# EAGLE board ts4231-breakout-module-panel (EAGLE 6.5.0)
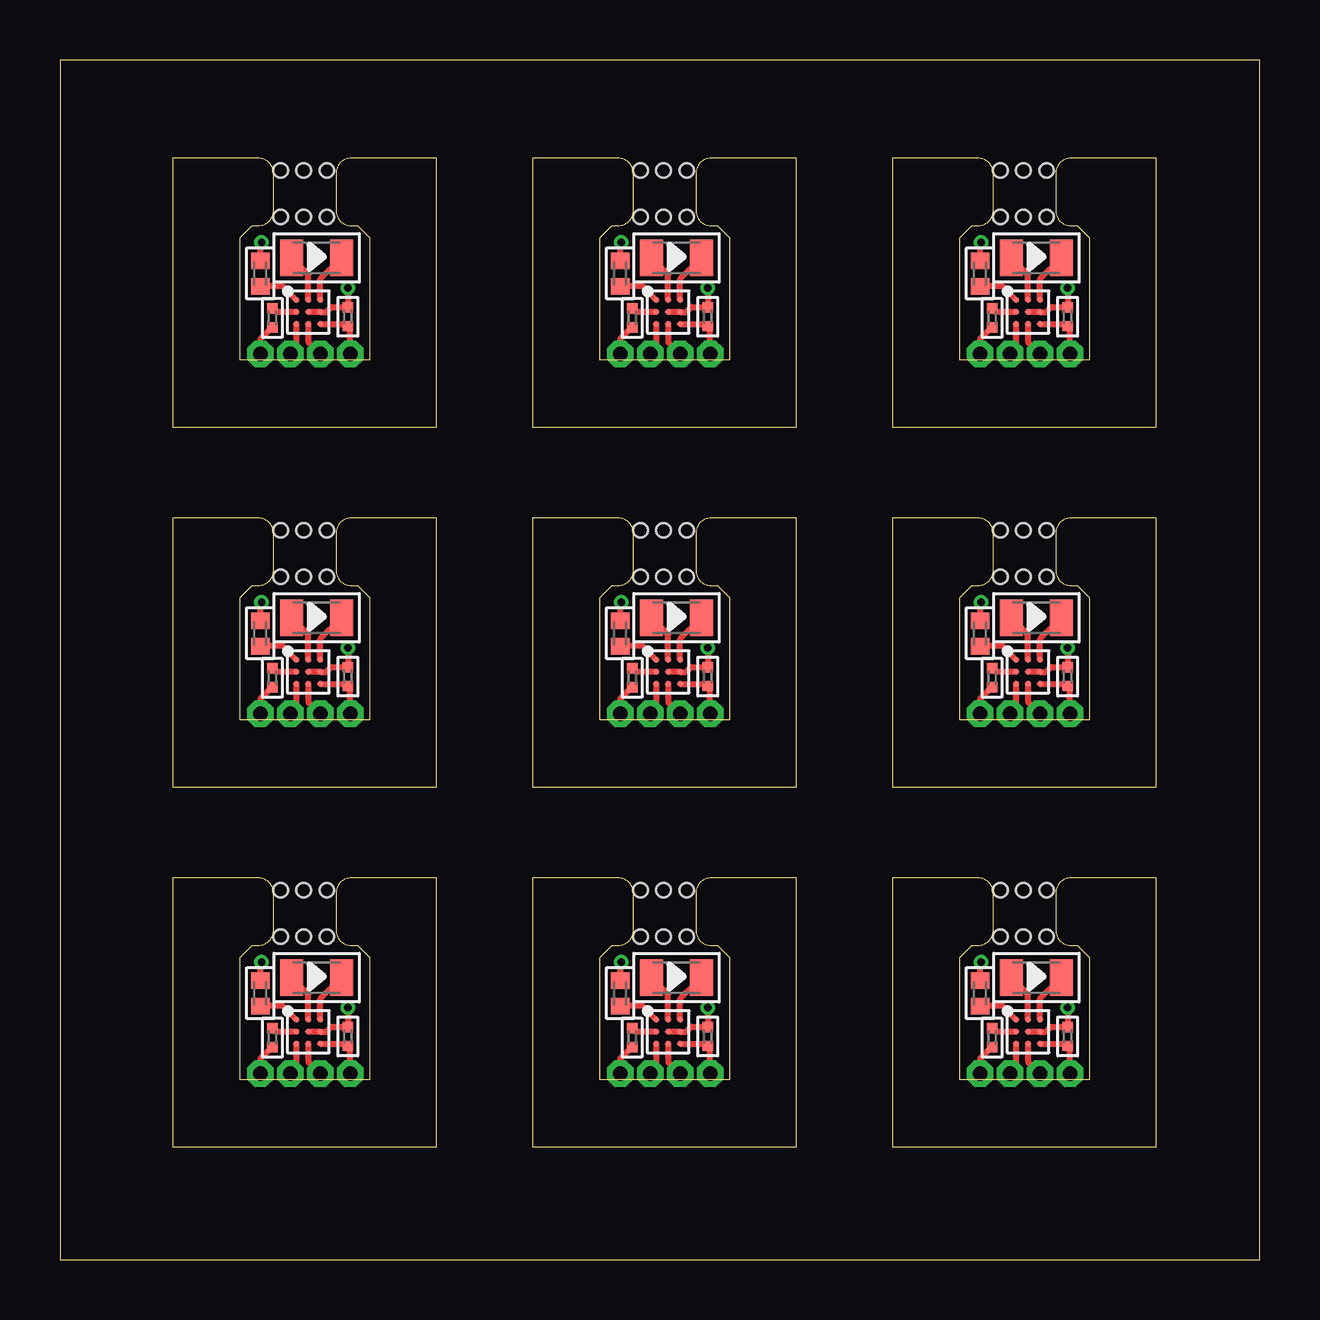
[diagram p0: board, top side]
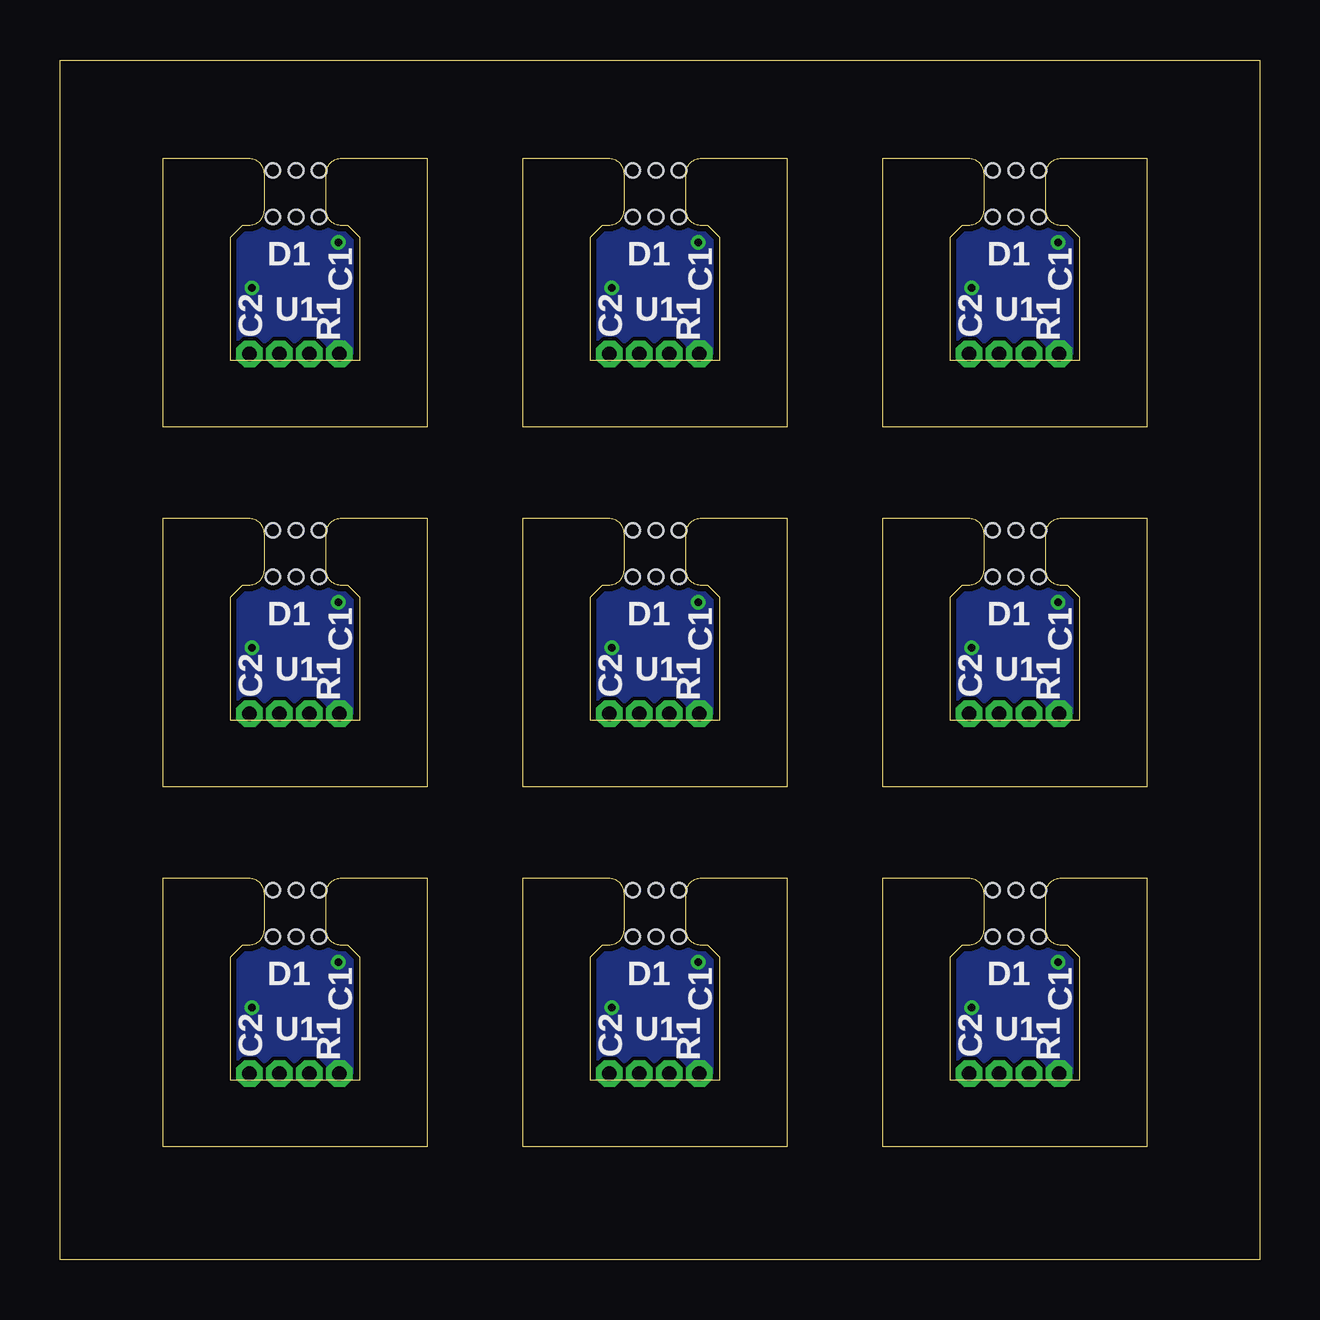
[diagram p1: board, bottom side, seen from below]

Size 50 x 50 mm. Coordinates in mm from the lower left corner, seen from the top.
Outline: 12.13,13.1 12.4,13.1 12.9,12.6 12.9,7.5 7.5,7.5 7.5,12.6 8,13.1 8.27,13.1 arc90 8.9,13.73 8.9,15.27 arc90 8.27,15.9 4.7,15.9 4.7,4.7 15.7,4.7 15.7,15.9 12.13,15.9 arc90 11.5,15.27 11.5,13.73 arc90 12.13,13.1
Outline: 0,0 50,0 50,50 0,50 0,0
Outline: 27.14,13.1 27.4,13.1 27.9,12.6 27.9,7.5 22.5,7.5 22.5,12.6 23,13.1 23.27,13.1 arc90 23.9,13.73 23.9,15.27 arc90 23.27,15.9 19.7,15.9 19.7,4.7 30.7,4.7 30.7,15.9 27.14,15.9 arc90 26.5,15.27 26.5,13.73 arc90 27.14,13.1
Outline: 42.13,13.1 42.4,13.1 42.9,12.6 42.9,7.5 37.5,7.5 37.5,12.6 38,13.1 38.27,13.1 arc90 38.9,13.73 38.9,15.27 arc90 38.27,15.9 34.7,15.9 34.7,4.7 45.7,4.7 45.7,15.9 42.13,15.9 arc90 41.5,15.27 41.5,13.73 arc90 42.13,13.1
Outline: 12.13,28.1 12.4,28.1 12.9,27.6 12.9,22.5 7.5,22.5 7.5,27.6 8,28.1 8.27,28.1 arc90 8.9,28.73 8.9,30.27 arc90 8.27,30.9 4.7,30.9 4.7,19.7 15.7,19.7 15.7,30.9 12.13,30.9 arc90 11.5,30.27 11.5,28.73 arc90 12.13,28.1
Outline: 27.14,28.1 27.4,28.1 27.9,27.6 27.9,22.5 22.5,22.5 22.5,27.6 23,28.1 23.27,28.1 arc90 23.9,28.73 23.9,30.27 arc90 23.27,30.9 19.7,30.9 19.7,19.7 30.7,19.7 30.7,30.9 27.14,30.9 arc90 26.5,30.27 26.5,28.73 arc90 27.14,28.1
Outline: 42.13,28.1 42.4,28.1 42.9,27.6 42.9,22.5 37.5,22.5 37.5,27.6 38,28.1 38.27,28.1 arc90 38.9,28.73 38.9,30.27 arc90 38.27,30.9 34.7,30.9 34.7,19.7 45.7,19.7 45.7,30.9 42.13,30.9 arc90 41.5,30.27 41.5,28.73 arc90 42.13,28.1
Outline: 12.13,43.1 12.4,43.1 12.9,42.6 12.9,37.5 7.5,37.5 7.5,42.6 8,43.1 8.27,43.1 arc90 8.9,43.73 8.9,45.27 arc90 8.27,45.9 4.7,45.9 4.7,34.7 15.7,34.7 15.7,45.9 12.13,45.9 arc90 11.5,45.27 11.5,43.73 arc90 12.13,43.1
Outline: 27.14,43.1 27.4,43.1 27.9,42.6 27.9,37.5 22.5,37.5 22.5,42.6 23,43.1 23.27,43.1 arc90 23.9,43.73 23.9,45.27 arc90 23.27,45.9 19.7,45.9 19.7,34.7 30.7,34.7 30.7,45.9 27.14,45.9 arc90 26.5,45.27 26.5,43.73 arc90 27.14,43.1
Outline: 42.13,43.1 42.4,43.1 42.9,42.6 42.9,37.5 37.5,37.5 37.5,42.6 38,43.1 38.27,43.1 arc90 38.9,43.73 38.9,45.27 arc90 38.27,45.9 34.7,45.9 34.7,34.7 45.7,34.7 45.7,45.9 42.13,45.9 arc90 41.5,45.27 41.5,43.73 arc90 42.13,43.1
Copper layers (1*16): Top 0.035mm / dielectric 1.5mm / Bottom 0.035mm
Design rules "seeed-studio-2-layer": minimum track width 6mil, minimum drill 12mil, track to track 6mil, track to pad 6mil, pad to pad 6mil, via to via 6mil, smd to smd 0mil, copper to edge 10mil, drill to drill 10mil, minimum pad ring 10mil, minimum via ring 6mil, stop-mask expansion 2mil, vias tented up to drill 100mil, thermal gap 10mil
Holes 0.6 mm at 9.2,15.39 10.16,15.39 11.13,15.39 9.2,13.46 10.16,13.46 11.13,13.46 24.2,15.39 25.16,15.39 26.13,15.39 24.2,13.46 25.16,13.46 26.13,13.46 39.2,15.39 40.16,15.39 41.13,15.39 39.2,13.46 40.16,13.46 41.13,13.46 9.2,30.39 10.16,30.39 11.13,30.39 9.2,28.46 10.16,28.46 11.13,28.46 24.2,30.39 25.16,30.39 26.13,30.39 24.2,28.46 25.16,28.46 26.13,28.46 39.2,30.39 40.16,30.39 41.13,30.39 39.2,28.46 40.16,28.46 41.13,28.46 9.2,45.39 10.16,45.39 11.13,45.39 9.2,43.46 10.16,43.46 11.13,43.46 24.2,45.39 25.16,45.39 26.13,45.39 24.2,43.46 25.16,43.46 26.13,43.46 39.2,45.39 40.16,45.39 41.13,45.39 39.2,43.46 40.16,43.46 41.13,43.46

## Footprints (pad centres in the part's own frame; a part is rotated, then mirrored left to right if it is on the bottom)
0402 = smd 0.686 x 0.762: 1 -0.533,0; 2 0.533,0
0201 = smd 0.432 x 0.432: 1 -0.394,0; 2 0.394,0
TP23MIL = drill 0.6 octagon: P$1 0,0
0805 = smd 0.965 x 1.524: 1 -1.041,0; 2 1.041,0
WLCSP3X3 = smd 0.25 x 0.25: A1 -0.5,0.5; A2 0,0.5; A3 0.5,0.5; B1 -0.5,0; B2 0,0; B3 0.5,0; C1 -0.5,-0.5; C2 0,-0.5; C3 0.5,-0.5

## Placement (x,y rotation side)
C1  1uF  [0402]  8.35,11.1 90 top
C2  0.1uF  [0201]  12,9.3 90 top
C3  1uF  [0402]  23.35,11.1 90 top
C4  0.1uF  [0201]  27,9.3 90 top
C5  1uF  [0402]  38.35,11.1 90 top
C6  0.1uF  [0201]  42,9.3 90 top
C7  1uF  [0402]  8.35,26.1 90 top
C8  0.1uF  [0201]  12,24.3 90 top
C9  1uF  [0402]  23.35,26.1 90 top
C10  0.1uF  [0201]  27,24.3 90 top
C11  1uF  [0402]  38.35,26.1 90 top
C12  0.1uF  [0201]  42,24.3 90 top
C13  1uF  [0402]  8.35,41.1 90 top
C14  0.1uF  [0201]  12,39.3 90 top
C15  1uF  [0402]  23.35,41.1 90 top
C16  0.1uF  [0201]  27,39.3 90 top
C17  1uF  [0402]  38.35,41.1 90 top
C18  0.1uF  [0201]  42,39.3 90 top
D  [TP23MIL]  9.6,7.75 0 top
D1  [0805]  10.7,11.75 0 top
D2  [0805]  25.7,11.75 0 top
D3  [TP23MIL]  24.6,7.75 0 top
D4  [0805]  40.7,11.75 0 top
D5  [TP23MIL]  39.6,7.75 0 top
D6  [0805]  10.7,26.75 0 top
D7  [TP23MIL]  9.6,22.75 0 top
D8  [0805]  25.7,26.75 0 top
D9  [TP23MIL]  24.6,22.75 0 top
D10  [0805]  40.7,26.75 0 top
D11  [TP23MIL]  39.6,22.75 0 top
D12  [0805]  10.7,41.75 0 top
D13  [TP23MIL]  9.6,37.75 0 top
D14  [0805]  25.7,41.75 0 top
D15  [TP23MIL]  24.6,37.75 0 top
D16  [0805]  40.7,41.75 0 top
D17  [TP23MIL]  39.6,37.75 0 top
E  [TP23MIL]  10.85,7.75 0 top
E1  [TP23MIL]  25.85,7.75 0 top
E2  [TP23MIL]  40.85,7.75 0 top
E3  [TP23MIL]  10.85,22.75 0 top
E4  [TP23MIL]  25.85,22.75 0 top
E5  [TP23MIL]  40.85,22.75 0 top
E6  [TP23MIL]  10.85,37.75 0 top
E7  [TP23MIL]  25.85,37.75 0 top
E8  [TP23MIL]  40.85,37.75 0 top
GND  [TP23MIL]  8.35,7.75 0 top
GND1  [TP23MIL]  23.35,7.75 0 top
GND2  [TP23MIL]  38.35,7.75 0 top
GND3  [TP23MIL]  8.35,22.75 0 top
GND4  [TP23MIL]  23.35,22.75 0 top
GND5  [TP23MIL]  38.35,22.75 0 top
GND6  [TP23MIL]  8.35,37.75 0 top
GND7  [TP23MIL]  23.35,37.75 0 top
GND8  [TP23MIL]  38.35,37.75 0 top
R1  15k  [0201]  8.85,9.25 90 top
R2  15k  [0201]  23.85,9.25 90 top
R3  15k  [0201]  38.85,9.25 90 top
R4  15k  [0201]  8.85,24.25 90 top
R5  15k  [0201]  23.85,24.25 90 top
R6  15k  [0201]  38.85,24.25 90 top
R7  15k  [0201]  8.85,39.25 90 top
R8  15k  [0201]  23.85,39.25 90 top
R9  15k  [0201]  38.85,39.25 90 top
U1  TS4231  [WLCSP3X3]  10.35,9.5 0 top
U2  TS4231  [WLCSP3X3]  25.35,9.5 0 top
U3  TS4231  [WLCSP3X3]  40.35,9.5 0 top
U4  TS4231  [WLCSP3X3]  10.35,24.5 0 top
U5  TS4231  [WLCSP3X3]  25.35,24.5 0 top
U6  TS4231  [WLCSP3X3]  40.35,24.5 0 top
U7  TS4231  [WLCSP3X3]  10.35,39.5 0 top
U8  TS4231  [WLCSP3X3]  25.35,39.5 0 top
U9  TS4231  [WLCSP3X3]  40.35,39.5 0 top
VDD  [TP23MIL]  12.1,7.75 0 top
VDD1  [TP23MIL]  27.1,7.75 0 top
VDD2  [TP23MIL]  42.1,7.75 0 top
VDD3  [TP23MIL]  12.1,22.75 0 top
VDD4  [TP23MIL]  27.1,22.75 0 top
VDD5  [TP23MIL]  42.1,22.75 0 top
VDD6  [TP23MIL]  12.1,37.75 0 top
VDD7  [TP23MIL]  27.1,37.75 0 top
VDD8  [TP23MIL]  42.1,37.75 0 top

## Library data of the parts
C1-C18 D D1-D17 E E1-E8 GND GND1-GND8 R1-R9 U1-U9 VDD VDD1-VDD8 = jonnew

## Nets
GND: C1.2 C2.2 GND.P$1 R1.1 U1.B2 U1.B3
GND1: C3.2 C4.2 GND1.P$1 R2.1 U2.B2 U2.B3
GND2: C5.2 C6.2 GND2.P$1 R3.1 U3.B2 U3.B3
GND3: C7.2 C8.2 GND3.P$1 R4.1 U4.B2 U4.B3
GND4: C9.2 C10.2 GND4.P$1 R5.1 U5.B2 U5.B3
GND5: C11.2 C12.2 GND5.P$1 R6.1 U6.B2 U6.B3
GND6: C13.2 C14.2 GND6.P$1 R7.1 U7.B2 U7.B3
GND7: C15.2 C16.2 GND7.P$1 R8.1 U8.B2 U8.B3
GND8: C17.2 C18.2 GND8.P$1 R9.1 U9.B2 U9.B3
N$1: D.P$1 U1.C1
N$2: E.P$1 U1.C2
N$3: D3.P$1 U2.C1
N$4: D1.2 U1.A3
N$5: D1.1 U1.A2
N$6: R1.2 U1.B1
N$7: C1.1 U1.A1
N$8: E1.P$1 U2.C2
N$9: D2.2 U2.A3
N$10: D2.1 U2.A2
N$11: R2.2 U2.B1
N$12: C3.1 U2.A1
N$13: D5.P$1 U3.C1
N$14: E2.P$1 U3.C2
N$15: D4.2 U3.A3
N$16: D4.1 U3.A2
N$17: R3.2 U3.B1
N$18: C5.1 U3.A1
N$19: D7.P$1 U4.C1
N$20: E3.P$1 U4.C2
N$21: D6.2 U4.A3
N$22: D6.1 U4.A2
N$23: R4.2 U4.B1
N$24: C7.1 U4.A1
N$25: D9.P$1 U5.C1
N$26: E4.P$1 U5.C2
N$27: D8.2 U5.A3
N$28: D8.1 U5.A2
N$29: R5.2 U5.B1
N$30: C9.1 U5.A1
N$31: D11.P$1 U6.C1
N$32: E5.P$1 U6.C2
N$33: D10.2 U6.A3
N$34: D10.1 U6.A2
N$35: R6.2 U6.B1
N$36: C11.1 U6.A1
N$37: D13.P$1 U7.C1
N$38: E6.P$1 U7.C2
N$39: D12.2 U7.A3
N$40: D12.1 U7.A2
N$41: R7.2 U7.B1
N$42: C13.1 U7.A1
N$43: D15.P$1 U8.C1
N$44: E7.P$1 U8.C2
N$45: D14.2 U8.A3
N$46: D14.1 U8.A2
N$47: R8.2 U8.B1
N$48: C15.1 U8.A1
N$49: D17.P$1 U9.C1
N$50: E8.P$1 U9.C2
N$51: D16.2 U9.A3
N$52: D16.1 U9.A2
N$53: R9.2 U9.B1
N$54: C17.1 U9.A1
VDD: C2.1 U1.C3 VDD.P$1
VDD1: C4.1 U2.C3 VDD1.P$1
VDD2: C6.1 U3.C3 VDD2.P$1
VDD3: C8.1 U4.C3 VDD3.P$1
VDD4: C10.1 U5.C3 VDD4.P$1
VDD5: C12.1 U6.C3 VDD5.P$1
VDD6: C14.1 U7.C3 VDD6.P$1
VDD7: C16.1 U8.C3 VDD7.P$1
VDD8: C18.1 U9.C3 VDD8.P$1

## Tracks (layer width: path | path; a pad name or v marks a point on that pad's centre or on a via)
GND  (via drill 0.3)
  Top 0.254: U1.B2 U1.B3 11.1,9.5 11.3,9.7 C2.2 v12,10.5 | R1.1 8.35,8.36 GND.P$1 | v8.4,12.4 8.35,12.25 C1.2
  pour Bottom (no thermals): 7.5,7.5 7.5,13.1 12.9,13.1 12.9,7.5
GND1  (via drill 0.3)
  Top 0.254: U2.B2 U2.B3 26.1,9.5 26.3,9.7 C4.2 v27,10.5 | R2.1 23.35,8.36 GND1.P$1 | v23.4,12.4 23.35,12.25 C3.2
  pour Bottom (no thermals): 22.5,7.5 22.5,13.1 27.9,13.1 27.9,7.5
GND2  (via drill 0.3)
  Top 0.254: U3.B2 U3.B3 41.1,9.5 41.3,9.7 C6.2 v42,10.5 | R3.1 38.35,8.36 GND2.P$1 | v38.4,12.4 38.35,12.25 C5.2
  pour Bottom (no thermals): 37.5,7.5 37.5,13.1 42.9,13.1 42.9,7.5
GND3  (via drill 0.3)
  Top 0.254: U4.B2 U4.B3 11.1,24.5 11.3,24.7 C8.2 v12,25.5 | R4.1 8.35,23.36 GND3.P$1 | v8.4,27.4 8.35,27.25 C7.2
  pour Bottom (no thermals): 7.5,22.5 7.5,28.1 12.9,28.1 12.9,22.5
GND4  (via drill 0.3)
  Top 0.254: U5.B2 U5.B3 26.1,24.5 26.3,24.7 C10.2 v27,25.5 | R5.1 23.35,23.36 GND4.P$1 | v23.4,27.4 23.35,27.25 C9.2
  pour Bottom (no thermals): 22.5,22.5 22.5,28.1 27.9,28.1 27.9,22.5
GND5  (via drill 0.3)
  Top 0.254: U6.B2 U6.B3 41.1,24.5 41.3,24.7 C12.2 v42,25.5 | R6.1 38.35,23.36 GND5.P$1 | v38.4,27.4 38.35,27.25 C11.2
  pour Bottom (no thermals): 37.5,22.5 37.5,28.1 42.9,28.1 42.9,22.5
GND6  (via drill 0.3)
  Top 0.254: U7.B2 U7.B3 11.1,39.5 11.3,39.7 C14.2 v12,40.5 | R7.1 8.35,38.36 GND6.P$1 | v8.4,42.4 8.35,42.25 C13.2
  pour Bottom (no thermals): 7.5,37.5 7.5,43.1 12.9,43.1 12.9,37.5
GND7  (via drill 0.3)
  Top 0.254: U8.B2 U8.B3 26.1,39.5 26.3,39.7 C16.2 v27,40.5 | R8.1 23.35,38.36 GND7.P$1 | v23.4,42.4 23.35,42.25 C15.2
  pour Bottom (no thermals): 22.5,37.5 22.5,43.1 27.9,43.1 27.9,37.5
GND8  (via drill 0.3)
  Top 0.254: U9.B2 U9.B3 41.1,39.5 41.3,39.7 C18.2 v42,40.5 | R9.1 38.35,38.36 GND8.P$1 | v38.4,42.4 38.35,42.25 C17.2
  pour Bottom (no thermals): 37.5,37.5 37.5,43.1 42.9,43.1 42.9,37.5
N$1
  Top 0.254: U1.C1 9.85,8 D.P$1
N$2
  Top 0.254: U1.C2 10.35,8.25 E.P$1
N$3
  Top 0.254: U2.C1 24.85,8 D3.P$1
N$4
  Top 0.254: U1.A3 10.85,10.86 D1.2
N$5
  Top 0.254: U1.A2 10.35,11.06 D1.1
N$6
  Top 0.254: U1.B1 8.99,9.5 R1.2
N$7
  Top 0.254: U1.A1 9.28,10.57 C1.1
N$8
  Top 0.254: U2.C2 25.35,8.25 E1.P$1
N$9
  Top 0.254: U2.A3 25.85,10.86 D2.2
N$10
  Top 0.254: U2.A2 25.35,11.06 D2.1
N$11
  Top 0.254: U2.B1 23.99,9.5 R2.2
N$12
  Top 0.254: U2.A1 24.28,10.57 C3.1
N$13
  Top 0.254: U3.C1 39.85,8 D5.P$1
N$14
  Top 0.254: U3.C2 40.35,8.25 E2.P$1
N$15
  Top 0.254: U3.A3 40.85,10.86 D4.2
N$16
  Top 0.254: U3.A2 40.35,11.06 D4.1
N$17
  Top 0.254: U3.B1 38.99,9.5 R3.2
N$18
  Top 0.254: U3.A1 39.28,10.57 C5.1
N$19
  Top 0.254: U4.C1 9.85,23 D7.P$1
N$20
  Top 0.254: U4.C2 10.35,23.25 E3.P$1
N$21
  Top 0.254: U4.A3 10.85,25.86 D6.2
N$22
  Top 0.254: U4.A2 10.35,26.06 D6.1
N$23
  Top 0.254: U4.B1 8.99,24.5 R4.2
N$24
  Top 0.254: U4.A1 9.28,25.57 C7.1
N$25
  Top 0.254: U5.C1 24.85,23 D9.P$1
N$26
  Top 0.254: U5.C2 25.35,23.25 E4.P$1
N$27
  Top 0.254: U5.A3 25.85,25.86 D8.2
N$28
  Top 0.254: U5.A2 25.35,26.06 D8.1
N$29
  Top 0.254: U5.B1 23.99,24.5 R5.2
N$30
  Top 0.254: U5.A1 24.28,25.57 C9.1
N$31
  Top 0.254: U6.C1 39.85,23 D11.P$1
N$32
  Top 0.254: U6.C2 40.35,23.25 E5.P$1
N$33
  Top 0.254: U6.A3 40.85,25.86 D10.2
N$34
  Top 0.254: U6.A2 40.35,26.06 D10.1
N$35
  Top 0.254: U6.B1 38.99,24.5 R6.2
N$36
  Top 0.254: U6.A1 39.28,25.57 C11.1
N$37
  Top 0.254: U7.C1 9.85,38 D13.P$1
N$38
  Top 0.254: U7.C2 10.35,38.25 E6.P$1
N$39
  Top 0.254: U7.A3 10.85,40.86 D12.2
N$40
  Top 0.254: U7.A2 10.35,41.06 D12.1
N$41
  Top 0.254: U7.B1 8.99,39.5 R7.2
N$42
  Top 0.254: U7.A1 9.28,40.57 C13.1
N$43
  Top 0.254: U8.C1 24.85,38 D15.P$1
N$44
  Top 0.254: U8.C2 25.35,38.25 E7.P$1
N$45
  Top 0.254: U8.A3 25.85,40.86 D14.2
N$46
  Top 0.254: U8.A2 25.35,41.06 D14.1
N$47
  Top 0.254: U8.B1 23.99,39.5 R8.2
N$48
  Top 0.254: U8.A1 24.28,40.57 C15.1
N$49
  Top 0.254: U9.C1 39.85,38 D17.P$1
N$50
  Top 0.254: U9.C2 40.35,38.25 E8.P$1
N$51
  Top 0.254: U9.A3 40.85,40.86 D16.2
N$52
  Top 0.254: U9.A2 40.35,41.06 D16.1
N$53
  Top 0.254: U9.B1 38.99,39.5 R9.2
N$54
  Top 0.254: U9.A1 39.28,40.57 C17.1
VDD
  Top 0.254: 12,9 C2.1 | U1.C3 11.91,9 C2.1 | VDD.P$1 12.1,8.81 C2.1
VDD1
  Top 0.254: 27,9 C4.1 | U2.C3 26.91,9 C4.1 | VDD1.P$1 27.1,8.81 C4.1
VDD2
  Top 0.254: 42,9 C6.1 | U3.C3 41.91,9 C6.1 | VDD2.P$1 42.1,8.81 C6.1
VDD3
  Top 0.254: 12,24 C8.1 | U4.C3 11.91,24 C8.1 | VDD3.P$1 12.1,23.81 C8.1
VDD4
  Top 0.254: 27,24 C10.1 | U5.C3 26.91,24 C10.1 | VDD4.P$1 27.1,23.81 C10.1
VDD5
  Top 0.254: 42,24 C12.1 | U6.C3 41.91,24 C12.1 | VDD5.P$1 42.1,23.81 C12.1
VDD6
  Top 0.254: 12,39 C14.1 | U7.C3 11.91,39 C14.1 | VDD6.P$1 12.1,38.81 C14.1
VDD7
  Top 0.254: 27,39 C16.1 | U8.C3 26.91,39 C16.1 | VDD7.P$1 27.1,38.81 C16.1
VDD8
  Top 0.254: 42,39 C18.1 | U9.C3 41.91,39 C18.1 | VDD8.P$1 42.1,38.81 C18.1

## Text on the board
_bNames: D1 | D1 | D1 | C1 | C1 | C1 | U1 | U1 | U1 | R1 | C2 | R1 | C2 | R1 | C2 | D1 | D1 | D1 | C1 | C1 | C1 | U1 | U1 | U1 | R1 | C2 | R1 | C2 | R1 | C2 | D1 | D1 | D1 | C1 | C1 | C1 | U1 | U1 | U1 | R1 | C2 | R1 | C2 | R1 | C2